# EAGLE board Stencil (EAGLE 9.6.2), part 1 of 2
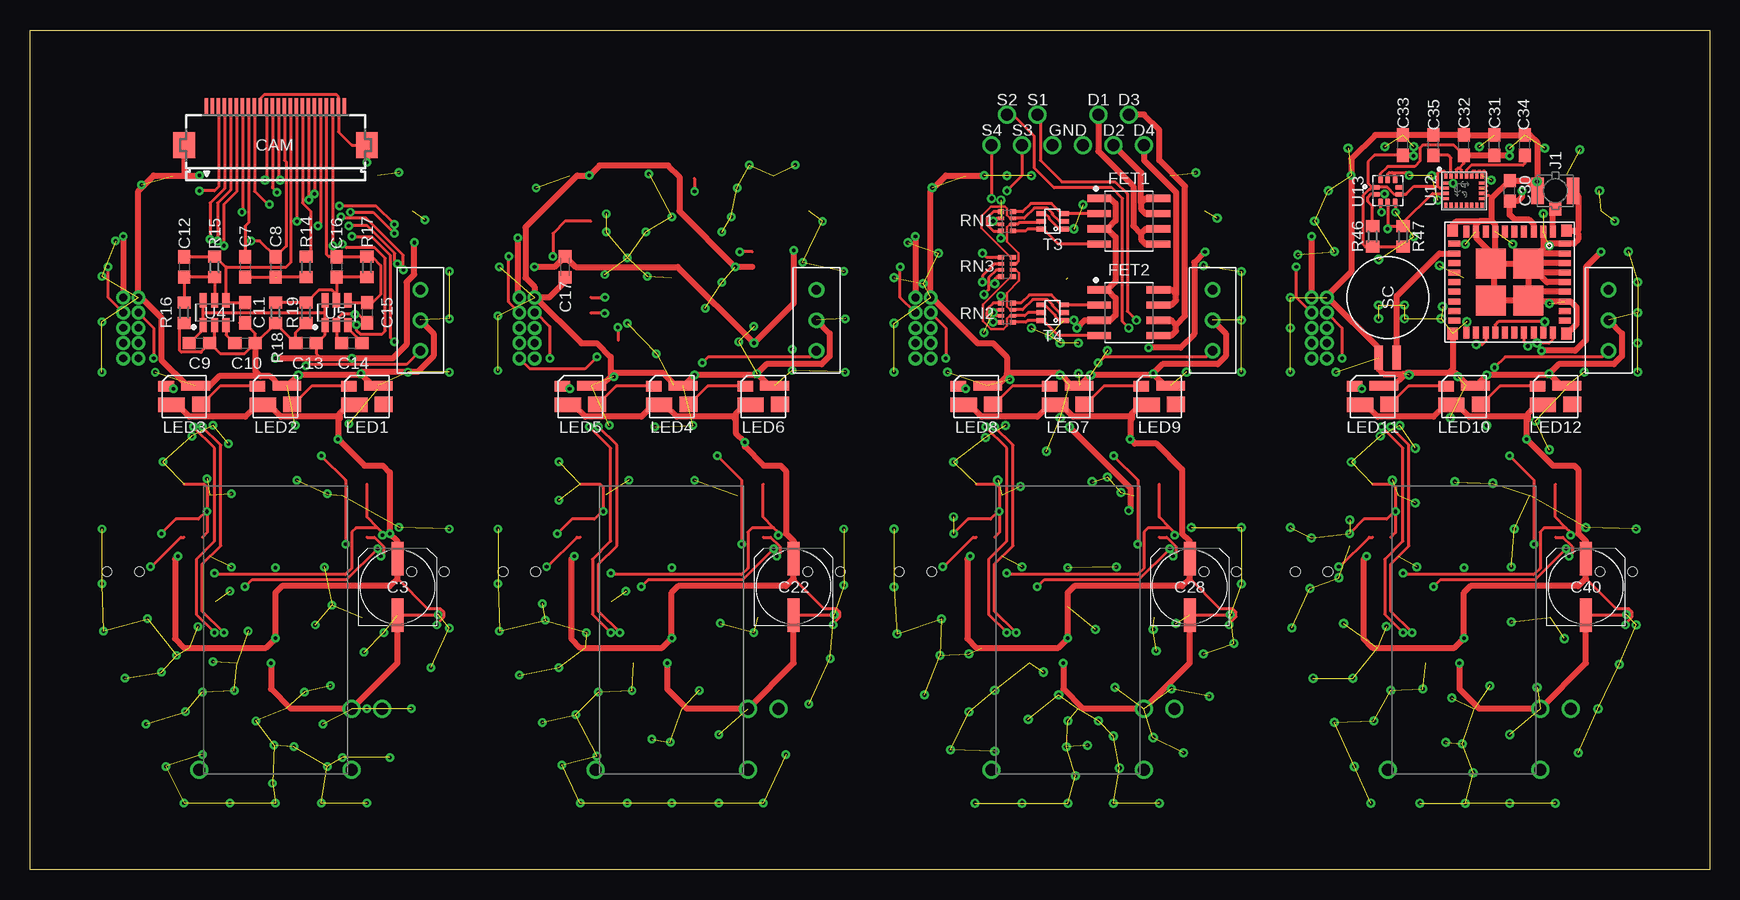
[diagram p0: board, top side]
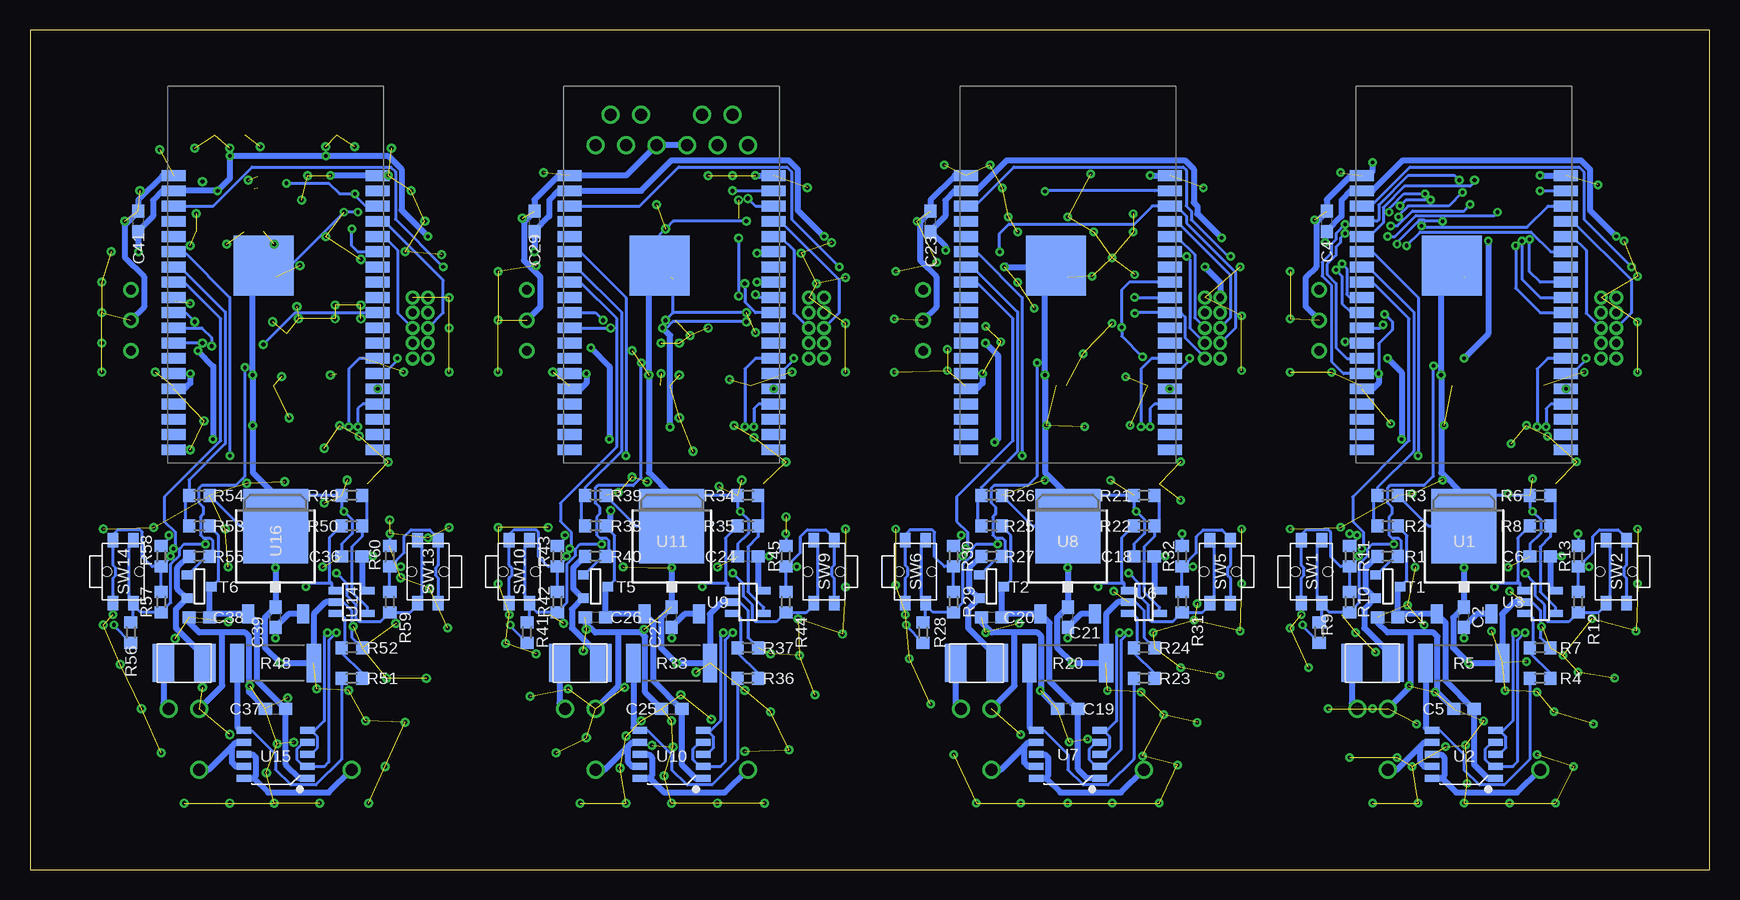
[diagram p1: board, bottom side, seen from below]

Size 140 x 70 mm. Coordinates in mm from the lower left corner, seen from the top.
Outline: 0,70 140,70 140,0 0,0 0,70
Copper layers (1*16): Top 0.035mm / dielectric 1.5mm / Bottom 0.035mm
Design rules "default": minimum track width 6mil, minimum drill 0.35mm, track to track 6mil, track to pad 6mil, pad to pad 6mil, via to via 6mil, smd to smd 6mil, copper to edge 40mil, drill to drill 6mil, minimum pad ring 10mil, minimum via ring 8mil, stop-mask expansion 4mil, vias tented up to drill 0mil, thermal gap 10mil

## Footprints (pad centres in the part's own frame; a part is rotated, then mirrored left to right if it is on the bottom)
C0603 = smd 1.1 x 1: 1 -0.85,0; 2 0.85,0
UD-6,3X7,7_NICHICON = smd 2.8 x 1: + 2.35,0; - -2.35,0
C0603K = smd 1.05 x 1.08: 1 -0.875,0; 2 0.875,0
FH12-24S-0.5SH = smd 0.3 x 1.3: 1 -5.75,3.25; 2 -5.25,3.25; 3 -4.75,3.25; 4 -4.25,3.25; 5 -3.75,3.25; 6 -3.25,3.25; 7 -2.75,3.25; 8 -2.25,3.25; 9 -1.75,3.25; 10 -1.25,3.25; 11 -0.75,3.25; 12 -0.25,3.25; 13 0.25,3.25; 14 0.75,3.25; 15 1.25,3.25; 16 1.75,3.25; 17 2.25,3.25; 18 2.75,3.25; 19 3.25,3.25; 20 3.75,3.25; 21 4.25,3.25; 22 4.75,3.25; 23 5.25,3.25; 24 5.75,3.25 | smd 1.8 x 2.2: PAD1 -7.62,0; PAD2 7.62,0
ESP32-WROVER-E = smd 2 x 0.9: 3V3 -8.5,10.16; EN -8.5,8.89; GND1 -8.5,11.43; GND2 -8.5,-6.35; GND3 8.5,11.43; IO0 8.5,-5.08; IO2 8.5,-6.35; IO4 8.5,-3.81; IO5 8.5,0; IO12 -8.5,-5.08; IO13 -8.5,-7.62; IO14 -8.5,-3.81; IO15 8.5,-7.62; IO16 8.5,-2.54; IO17 8.5,-1.27; IO18 8.5,1.27; IO19 8.5,2.54; IO21 8.5,5.08; IO22 8.5,8.89; IO23 8.5,10.16; IO25 -8.5,0; IO26 -8.5,-1.27; IO27 -8.5,-2.54; IO32 -8.5,2.54; IO33 -8.5,1.27; IO34 -8.5,5.08; IO35 -8.5,3.81; NC 8.5,3.81; NC0 -8.5,-8.89; NC1 -8.5,-10.16; NC2 -8.5,-11.43; NC3 8.5,-11.43; NC4 8.5,-10.16; NC5 8.5,-8.89; RXD0 8.5,6.35; SENSOR_VN -8.5,6.35; SENSOR_VP -8.5,7.62; TXD0 8.5,7.62 | smd 5 x 5: P_GND -1,3.93
SOIC127P600X175-8N = smd 1.968 x 0.602: 1 -2.473,1.905; 2 -2.473,0.635; 3 -2.473,-0.635; 4 -2.473,-1.905; 5 2.473,-1.905; 6 2.473,-0.635; 7 2.473,0.635; 8 2.473,1.905
SMD1812P = smd 1.78 x 3.15: 1 -1.725,0; 2 1.725,0
U.FL_SMT = smd 1.05 x 2.2: GND1 -1.475,0; GND2 1.475,0 | smd 1 x 1.05: SIG 0,-1.525
SK68XXMINI = smd 1.3 x 0.9: P1 1.5,-0.85 | smd 2.2 x 1.2: P2 1.05,0.7 | smd 1.5 x 1.3: P3 -1.4,0.65 | smd 2.4 x 0.8: P4 -0.95,-0.9
R0603 = smd 1 x 1.1: 1 -0.85,0; 2 0.85,0
R6332W = smd 1.2 x 3.2: 1 -3.196,0; 2 3.196,0
4X0402ARV341 = smd 0.4 x 0.5: 1 -0.8,-0.5; 4 0.8,-0.5; 5 0.8,0.5; 8 -0.8,0.5 | smd 0.3 x 0.5: 2 -0.25,-0.5; 3 0.25,-0.5; 6 0.25,0.5; 7 -0.25,0.5
DC,DCK = smd 0.7 x 2: + 0.75,-5; - -0.75,-5
THAU13-AB-R = smd 1.2 x 0.9: 1 -2.625,0.85; 2 2.625,0.85; 3 -2.625,-0.85; 4 2.625,-0.85 | hole 0.8: 0,1.35; 0,-1.35
SOT-23 = smd 0.787 x 0.889: 1 0.025,-1.016; 2 -0.94,1.016; 3 0.991,1.016
SOT-363 = smd 0.4 x 0.8: 1 -0.65,-0.95; 2 0,-0.95; 3 0.65,-0.95; 4 0.65,0.95; 5 0,0.95; 6 -0.65,0.95
TO252 = smd 1 x 1.6: 1 -2.28,-4.8; 3 2.28,-4.8 | smd 5.4 x 6.2: 2 0,2.5
SOIC10-1.0-5X4MM = smd 0.6 x 1.2: 1 -2,-2.65; 2 -1,-2.65; 3 0,-2.65; 4 1,-2.65; 5 2,-2.65; 6 2,2.65; 7 1,2.65; 8 0,2.65; 9 -1,2.65; 10 -2,2.65
SOT23-5 = smd 0.6 x 1.2: 1 -0.95,-1.306; 2 0,-1.306; 3 0.95,-1.306; 4 0.95,1.306; 5 -0.95,1.306
SOT95P240X110-6N = smd 1.18 x 0.609: 1 -1.024,0.95; 2 -1.024,0; 3 -1.024,-0.95; 4 1.024,-0.95; 5 1.024,0; 6 1.024,0.95
LGA24-8X4 = smd 0.27 x 0.45: 1 -1.505,1.225; 6 -1.505,-1.225; 7 -1.075,-1.225; 8 -0.645,-1.225; 9 -0.215,-1.225; 10 0.215,-1.225; 11 0.645,-1.225; 12 1.075,-1.225; 13 1.505,-1.225; 18 1.505,1.225; 19 1.075,1.225; 20 0.645,1.225; 21 0.215,1.225; 22 -0.215,1.225; 23 -0.645,1.225; 24 -1.075,1.225 | smd 0.45 x 0.27: 2 -1.475,0.645; 3 -1.475,0.215; 4 -1.475,-0.215; 5 -1.475,-0.645; 14 1.475,-0.645; 15 1.475,-0.215; 16 1.475,0.215; 17 1.475,0.645
PQFN60P250X250X80-10N = smd 0.59 x 0.4: 1 -0.92,0.3; 2 -0.92,-0.3; 6 0.92,-0.3; 7 0.92,0.3 | smd 0.4 x 0.59: 3 -0.6,-0.92; 4 0,-0.92; 5 0.6,-0.92; 8 0.6,0.92; 9 0,0.92; 10 -0.6,0.92
SS12D01GX = drill 0.8: 1 -2.54,0; 2 0,0; 3 2.54,0
P2_5_1.27 = drill 0.65 pad 1.016: P1 0,2.54; P2 1.27,2.54; P3 0,1.27; P4 1.27,1.27; P5 0,0; P6 1.27,0; P7 0,-1.27; P8 1.27,-1.27; P9 0,-2.54; P10 1.27,-2.54
GYSFFMANC = smd 1 x 0.9: 1 -4.3,4.75; 12 -4.3,-4.75; 22 4.3,-4.75; 33 4.3,4.75 | smd 1 x 0.5: 2 -4.2,3.6; 3 -4.2,2.8; 4 -4.2,2; 5 -4.2,1.2; 6 -4.2,0.4; 7 -4.2,-0.4; 8 -4.2,-1.2; 9 -4.2,-2; 10 -4.2,-2.8; 11 -4.2,-3.6; 23 4.2,-3.6; 24 4.2,-2.8; 25 4.2,-2; 26 4.2,-1.2; 27 4.2,-0.4; 28 4.2,0.4; 29 4.2,1.2; 30 4.2,2; 31 4.2,2.8; 32 4.2,3.6 | smd 0.5 x 1: 13 -3.2,-4.6; 14 -2.4,-4.6; 15 -1.6,-4.6; 16 -0.8,-4.6; 17 0,-4.6; 18 0.8,-4.6; 19 1.6,-4.6; 20 2.4,-4.6; 21 3.2,-4.6; 34 3.2,4.6; 35 2.4,4.6; 36 1.6,4.6; 37 0.8,4.6; 38 0,4.6; 39 -0.8,4.6; 40 -1.6,4.6; 41 -2.4,4.6; 42 -3.2,4.6 | smd 2.5 x 2.5: 43 -1.55,1.55; 44 -1.55,-1.55; 45 1.55,-1.55; 46 1.55,1.55

## Placement (x,y rotation side)
C1  0.33µF  [C0603]  26.82,21.03 180 bottom
C2  2.2µF  [C0603]  20.47,21.03 90 bottom
C3  220µF  [UD-6,3X7,7_NICHICON]  30.63,23.57 90 top
C4  0.1µF  [C0603]  31.9,54.05 90 bottom
C5  1µF  [C0603]  20.47,13.41 0 bottom
C6  0.1µF  [C0603]  14.12,26.11 180 bottom
C7  15pF  [C0603]  17.93,50.24 270 top
C8  0.1µF  [C0603]  20.47,50.24 270 top
C9  0.1µF  [C0603]  14.12,43.89 0 top
C10  0.01µF  [C0603]  17.93,43.89 0 top
C11  2.2µF  [C0603]  17.93,46.43 270 top
C12  100pF  [C0603]  12.85,50.24 270 top
C13  0.1µF  [C0603]  23.01,43.89 180 top
C14  0.01µF  [C0603]  26.82,43.89 180 top
C15  1.0µF  [C0603]  28.09,46.43 270 top
C16  100pF  [C0603]  25.55,50.24 270 top
C17  0.1µF  [C0603K]  44.6,50.24 270 top
C18  0.1µF  [C0603]  47.14,26.11 180 bottom
C19  1µF  [C0603]  53.49,13.41 0 bottom
C20  0.33µF  [C0603]  59.84,21.03 180 bottom
C21  2.2µF  [C0603]  53.49,21.03 90 bottom
C22  220µF  [UD-6,3X7,7_NICHICON]  63.65,23.57 90 top
C23  0.1µF  [C0603]  64.92,54.05 90 bottom
C24  0.1µF  [C0603]  80.16,26.11 180 bottom
C25  1µF  [C0603]  86.51,13.41 0 bottom
C26  0.33µF  [C0603]  92.86,21.03 180 bottom
C27  2.2µF  [C0603]  86.51,21.03 90 bottom
C28  220µF  [UD-6,3X7,7_NICHICON]  96.67,23.57 90 top
C29  0.1µF  [C0603]  97.94,54.05 90 bottom
C30  [C0603]  123.34,56.59 90 top
C31  10µF  [C0603]  122.07,60.4 90 top
C32  0.1µF  [C0603]  119.53,60.4 90 top
C33  0.1µF  [C0603]  114.45,60.4 90 top
C34  0.1µF  [C0603]  124.61,60.4 90 top
C35  0.01µF  [C0603]  116.99,60.4 90 top
C36  0.1µF  [C0603]  113.18,26.11 180 bottom
C37  1µF  [C0603]  119.53,13.41 0 bottom
C38  0.33µF  [C0603]  125.88,21.03 180 bottom
C39  2.2µF  [C0603]  119.53,21.03 90 bottom
C40  220µF  [UD-6,3X7,7_NICHICON]  129.69,23.57 90 top
C41  0.1µF  [C0603]  130.96,54.05 90 bottom
CAM  OV2640_FPC  [FH12-24S-0.5SH]  20.47,60.4 0 top
ESP32  ESP32-WROVER-E  [ESP32-WROVER-E]  20.47,46.43 0 bottom
FET1  FDS4935A  [SOIC127P600X175-8N]  91.59,54.05 0 top
FET2  FDS4935A  [SOIC127P600X175-8N]  91.59,46.43 0 top
HUSE1  SMD1812P125TS  [SMD1812P]  28.09,17.22 0 bottom
HUSE2  SMD1812P125TS  [SMD1812P]  61.11,17.22 0 bottom
HUSE3  SMD1812P125TS  [SMD1812P]  94.13,17.22 0 bottom
HUSE4  SMD1812P125TS  [SMD1812P]  127.15,17.22 0 bottom
J1  U.FL-R-SMT  [U.FL_SMT]  127.15,56.59 0 top
LED1  SK6812MINI  [SK68XXMINI]  28.09,39.45 180 top
LED2  SK6812MINI  [SK68XXMINI]  20.47,39.45 180 top
LED3  SK6812MINI  [SK68XXMINI]  12.85,39.45 180 top
LED4  SK6812MINI  [SK68XXMINI]  53.49,39.45 180 top
LED5  SK6812MINI  [SK68XXMINI]  45.87,39.45 180 top
LED6  SK6812MINI  [SK68XXMINI]  61.11,39.45 180 top
LED7  SK6812MINI  [SK68XXMINI]  86.51,39.45 180 top
LED8  SK6812MINI  [SK68XXMINI]  78.89,39.45 180 top
LED9  SK6812MINI  [SK68XXMINI]  94.13,39.45 180 top
LED10  SK6812MINI  [SK68XXMINI]  119.53,39.45 180 top
LED11  SK6812MINI  [SK68XXMINI]  111.91,39.45 180 top
LED12  SK6812MINI  [SK68XXMINI]  127.15,39.45 180 top
R1  100k  [R0603]  26.82,26.11 180 bottom
R2  200k  [R0603]  26.82,28.65 0 bottom
R3  100k  [R0603]  26.82,31.19 180 bottom
R4  1k  [R0603]  14.12,15.95 0 bottom
R5  20m  [R6332W]  20.47,17.22 180 bottom
R6  1k  [R0603]  14.12,31.19 0 bottom
R7  100k  [R0603]  14.12,18.49 0 bottom
R8  100k  [R0603]  14.12,28.65 180 bottom
R9  [R0603]  32.53,19.76 270 bottom
R10  [R0603]  29.99,22.3 270 bottom
R11  [R0603]  29.99,26.11 270 bottom
R12  [R0603]  10.95,22.3 270 bottom
R13  [R0603]  10.95,26.11 270 bottom
R14  1k  [R0603]  23.01,50.24 270 top
R15  10k  [R0603]  15.39,50.24 90 top
R16  100k  [R0603]  12.85,46.43 90 top
R17  10k  [R0603]  28.09,50.24 90 top
R18  47k  [R0603]  20.47,46.43 90 top
R19  10k  [R0603]  23.01,46.43 90 top
R20  20m  [R6332W]  53.49,17.22 180 bottom
R21  1k  [R0603]  47.14,31.19 0 bottom
R22  100k  [R0603]  47.14,28.65 180 bottom
R23  1k  [R0603]  47.14,15.95 0 bottom
R24  100k  [R0603]  47.14,18.49 0 bottom
R25  200k  [R0603]  59.84,28.65 0 bottom
R26  100k  [R0603]  59.84,31.19 180 bottom
R27  100k  [R0603]  59.84,26.11 180 bottom
R28  [R0603]  65.56,19.76 270 bottom
R29  [R0603]  63.02,22.3 270 bottom
R30  [R0603]  63.02,26.11 270 bottom
R31  [R0603]  43.97,22.3 270 bottom
R32  [R0603]  43.97,26.11 270 bottom
R33  20m  [R6332W]  86.51,17.22 180 bottom
R34  1k  [R0603]  80.16,31.19 0 bottom
R35  100k  [R0603]  80.16,28.65 180 bottom
R36  1k  [R0603]  80.16,15.95 0 bottom
R37  100k  [R0603]  80.16,18.49 0 bottom
R38  200k  [R0603]  92.86,28.65 0 bottom
R39  100k  [R0603]  92.86,31.19 180 bottom
R40  100k  [R0603]  92.86,26.11 180 bottom
R41  [R0603]  98.58,19.76 270 bottom
R42  [R0603]  96.03,22.3 270 bottom
R43  [R0603]  96.03,26.11 270 bottom
R44  [R0603]  76.98,22.3 270 bottom
R45  [R0603]  76.98,26.11 270 bottom
R46  10k  [R0603]  111.91,52.78 270 top
R47  10k  [R0603]  114.45,52.78 270 top
R48  20m  [R6332W]  119.53,17.22 180 bottom
R49  1k  [R0603]  113.18,31.19 0 bottom
R50  100k  [R0603]  113.18,28.65 180 bottom
R51  1k  [R0603]  113.18,15.95 0 bottom
R52  100k  [R0603]  113.18,18.49 0 bottom
R53  200k  [R0603]  125.88,28.65 0 bottom
R54  100k  [R0603]  125.88,31.19 180 bottom
R55  100k  [R0603]  125.88,26.11 180 bottom
R56  [R0603]  131.59,19.76 270 bottom
R57  [R0603]  129.06,22.3 270 bottom
R58  [R0603]  129.06,26.11 270 bottom
R59  [R0603]  110,22.3 270 bottom
R60  [R0603]  110,26.11 270 bottom
RN1  10k  [4X0402ARV341]  81.43,54.05 270 top
RN2  10k  [4X0402ARV341]  81.43,46.43 270 top
RN3  10k  [4X0402ARV341]  81.43,50.24 270 top
SC  DCK-3R3E  [DC,DCK]  113.18,47.7 0 top
SW1  THAU13-AB-R  [THAU13-AB-R]  33.17,24.84 270 bottom
SW2  THAU13-AB-R  [THAU13-AB-R]  7.77,24.84 90 bottom
SW5  THAU13-AB-R  [THAU13-AB-R]  40.79,24.84 90 bottom
SW6  THAU13-AB-R  [THAU13-AB-R]  66.19,24.84 270 bottom
SW9  THAU13-AB-R  [THAU13-AB-R]  73.81,24.84 90 bottom
SW10  THAU13-AB-R  [THAU13-AB-R]  99.21,24.84 270 bottom
SW13  THAU13-AB-R  [THAU13-AB-R]  106.83,24.84 90 bottom
SW14  THAU13-AB-R  [THAU13-AB-R]  132.23,24.84 270 bottom
T1  [SOT-23]  26.82,23.57 90 bottom
T2  [SOT-23]  59.84,23.57 90 bottom
T3  HN1C01FU  [SOT-363]  85.24,54.05 90 top
T4  HN1C01FU  [SOT-363]  85.24,46.43 90 top
T5  [SOT-23]  92.86,23.57 90 bottom
T6  [SOT-23]  125.88,23.57 90 bottom
U1  I-02247_NJM2845  [TO252]  20.47,26.11 0 bottom
U2  DRIVER-LV8548MC-AH(SOIC10)  [SOIC10-1.0-5X4MM]  20.47,9.6 90 bottom
U3  OPA340N  [SOT23-5]  14.12,22.3 270 bottom
U4  NJM11100  [SOT95P240X110-6N]  15.39,46.43 90 top
U5  NJM11100  [SOT95P240X110-6N]  25.55,46.43 90 top
U6  OPA340N  [SOT23-5]  47.14,22.3 270 bottom
U7  DRIVER-LV8548MC-AH(SOIC10)  [SOIC10-1.0-5X4MM]  53.49,9.6 90 bottom
U8  I-02247_NJM2845  [TO252]  53.49,26.11 0 bottom
U9  OPA340N  [SOT23-5]  80.16,22.3 270 bottom
U10  DRIVER-LV8548MC-AH(SOIC10)  [SOIC10-1.0-5X4MM]  86.51,9.6 90 bottom
U11  I-02247_NJM2845  [TO252]  86.51,26.11 0 bottom
U12  LSM9DS1  [LGA24-8X4]  119.53,56.59 0 top
U13  LPS25HB  [PQFN60P250X250X80-10N]  113.18,56.59 0 top
U14  OPA340N  [SOT23-5]  113.18,22.3 270 bottom
U15  DRIVER-LV8548MC-AH(SOIC10)  [SOIC10-1.0-5X4MM]  119.53,9.6 90 bottom
U16  I-02247_NJM2845  [TO252]  119.53,26.11 0 bottom
U$1  ESP32-WROVER-E  [ESP32-WROVER-E]  86.51,46.43 0 bottom
U$2  ESP32-WROVER-E  [ESP32-WROVER-E]  53.49,46.43 0 bottom
U$3  SS12D01GX  [SS12D01GX]  98.58,45.8 90 top
U$4  SS12D01GX  [SS12D01GX]  65.56,45.8 90 top
U$5  P2_5_1.27  [P2_5_1.27]  40.79,45.16 0 top
U$6  P2_5_1.27  [P2_5_1.27]  73.81,45.16 0 top
U$7  GYSFFMANC  [GYSFFMANC]  123.34,48.97 270 top
U$8  SS12D01GX  [SS12D01GX]  32.53,45.8 90 top
U$9  P2_5_1.27  [P2_5_1.27]  7.77,45.16 0 top
U$10  ESP32-WROVER-E  [ESP32-WROVER-E]  119.53,46.43 0 bottom
U$11  SS12D01GX  [SS12D01GX]  131.59,45.8 90 top
U$12  P2_5_1.27  [P2_5_1.27]  106.83,45.16 0 top

## Library data of the parts
C1-C8 C17-C41 = rcl; SPICEPREFIX: C
C9-C16 R15-R19 = resistor
CAM = camera
ESP32 U$1 U$2 U$10 = esp32
FET1 FET2 = mosfets
HUSE1-HUSE4 = ptc
J1 = connector; DIGIKEY: H122041-ND; MANUFACTURER: Hirose; MPN: U.FL-R-SMT-1(01)
LED1-LED12 = leds
R1-R14 R20-R60 = rcl; SPICEPREFIX: R
RN1-RN3 = resistor-dil; OC_FARNELL: unknown; OC_NEWARK: unknown
SC = capacitors
SW1 SW2 SW5 SW6 SW9 SW10 SW13 SW14 U$3 U$4 U$8 U$11 = switches
T1 T2 T5 T6 = zetex; OC_FARNELL: unknown; OC_NEWARK: unknown
T3 T4 = transistors
U1 U8 U11 U16 = akizuki
U2 U7 U10 U15 = DRIVER-LV8548MC-AH_SOIC10_; AVAILABILITY: Not in stock; DESCRIPTION: Half Bridge (4) Driver DC Motors, General Purpose, Stepper Motors DMOS 10-SOIC; MF: ON Semiconductor; MP: LV8548MC-AH; PACKAGE: SOIC NB-10 ON Semiconductor; PRICE: None
U3 U6 U9 U14 = burr-brown; MPN: OPA340NA/3KG4; OC_FARNELL: 1234805; OC_NEWARK: 13M5177
U4 U5 = regulators
U12 = LSM9DS1; PROD_ID: IC-12536
U13 = LPS25HB; AVAILABILITY: In Stock; DESCRIPTION: Pressure Sensor 3.77PSI ~ 18.27PSI (26kPa ~ 126kPa) Absolute - 24 b 10-VFLGA; MF: STMicroelectronics; MP: LPS25HB; PACKAGE: VFLGA-10 STMicroelectronics; PRICE: None; PURCHASE-URL: https://pricing.snapeda.com/search/part/LPS25HB/?ref=eda
U$5 U$6 U$9 U$12 = pins
U$7 = gps

## Nets
1: U$9.P7
1.3V: C11.1 C12.1 CAM.15 R15.2 U4.4
1PPS: U$7.29 U$10.IO26
2: U$9.P8
2.8V: C15.1 C16.1 CAM.21 R17.2 U5.4
3: U$9.P9
4: U$9.P10
5: U$6.P7
6: U$6.P8
7: U$6.P9
8: U$6.P10
9: U$12.P7
10: U$12.P8
11: U$12.P9
12: U$12.P10
ANT: J1.SIG U$7.2
BAT+: HUSE1.1
BAT+1: HUSE2.1
BAT+2: HUSE3.1
BAT+3: HUSE4.1
C1: RN3.1 U$1.IO21
C2: RN3.2 U$1.IO19
C3: RN3.3 U$1.IO18
C4: RN3.4 U$1.IO5
CAM_RESET: CAM.19 ESP32.IO14
D0: CAM.6 ESP32.IO5
D1: CAM.4 ESP32.IO19
D2: CAM.3 ESP32.IO23
D3: CAM.5 ESP32.IO18
D4: CAM.7 ESP32.IO27
D5: CAM.9 ESP32.IO33
D6: CAM.11 ESP32.SENSOR_VN
D7: CAM.13 ESP32.SENSOR_VP
D8: FET1.5 FET1.6
D9: FET1.7 FET1.8
D10: FET2.5 FET2.6
D11: FET2.7 FET2.8
GND: C1.2 C2.2 C3.- C4.2 C5.1 C6.2 C7.2 C8.2 C9.2 C10.2 C11.2 C13.2 C14.2 C15.2 CAM.10 CAM.23 CAM.PAD1 CAM.PAD2 ESP32.GND1 ESP32.GND2 ESP32.GND3 ESP32.P_GND LED1.P4 LED2.P4 LED3.P4 R3.1 R5.1 R6.1 R7.2 R13.1 R14.2 R16.1 R18.1 R19.1 U1.2 U3.2 U4.2 U5.2 U$8.2 U$9.P2
GND1: C17.2 C18.2 C19.1 C20.2 C21.2 C22.- C23.2 LED4.P4 LED5.P4 LED6.P4 R20.1 R21.1 R24.2 R26.1 R32.1 U6.2 U8.2 U$2.GND1 U$2.GND2 U$2.GND3 U$2.P_GND U$4.2 U$5.P2
GND2: C24.2 C25.1 C26.2 C27.2 C28.- C29.2 LED7.P4 LED8.P4 LED9.P4 R33.1 R34.1 R37.2 R39.1 R45.1 RN1.2 RN1.3 RN2.2 RN2.3 T3.1 T3.4 T4.1 T4.4 U9.2 U11.2 U$1.GND1 U$1.GND2 U$1.GND3 U$1.P_GND U$3.2 U$6.P2
GND3: C30.2 C31.2 C32.2 C33.2 C34.2 C35.2 C36.2 C37.1 C38.2 C39.2 C40.- C41.2 J1.GND1 J1.GND2 LED10.P4 LED11.P4 LED12.P4 R48.1 R49.1 R52.2 R54.1 R60.1 SC.- U12.14 U12.15 U12.16 U12.17 U12.18 U12.19 U12.20 U13.3 U13.5 U13.8 U13.9 U14.2 U16.2 U$7.1 U$7.3 U$7.8 U$7.10 U$7.12 U$7.22 U$7.33 U$7.36 U$7.37 U$7.38 U$7.39 U$7.40 U$7.41 U$7.42 U$7.43 U$7.44 U$7.45 U$7.46 U$10.GND1 U$10.GND2 U$10.GND3 U$10.P_GND U$11.2 U$12.P2
GPS_!RESET!: U$7.32 U$10.IO27
GPS_RTX: U$7.26 U$10.IO25
GPS_TRX: U$7.25 U$10.IO5
HSYNC: CAM.16 ESP32.IO26
I2C_SCL: CAM.20 ESP32.IO22
I2C_SCL1: R46.1 U12.2 U13.2 U$10.IO22
I2C_SDA: CAM.22 ESP32.IO21
I2C_SDA1: R47.1 U12.4 U13.4 U$10.IO21
LED: ESP32.IO2 LED3.P1
LED1: LED5.P1 U$2.IO2
LED2: LED8.P1 U$1.IO2
LED3: LED11.P1 U$10.IO2
M1: U2.8 U2.10
M2: U2.7 U2.9
M3: U7.8 U7.10
M4: U7.7 U7.9
M5: U10.8 U10.10
M6: U10.7 U10.9
M7: U15.8 U15.10
M8: U15.7 U15.9
MC1: ESP32.IO15 U2.2 U2.4
MC2: ESP32.IO4 U2.3 U2.5
MC3: U7.2 U7.4 U$2.IO15
MC4: U7.3 U7.5 U$2.IO4
MC5: U10.2 U10.4 U$1.IO15
MC6: U10.3 U10.5 U$1.IO4
MC7: U15.2 U15.4 U$10.IO15
MC8: U15.3 U15.5 U$10.IO4
MGND: R4.1 R5.2 U2.6
MGND1: R20.2 R23.1 U7.6
MGND2: R33.2 R36.1 U10.6
MGND3: R48.2 R51.1 U15.6
MSENSE: ESP32.IO32 R8.2 U3.1
MSENSE1: R22.2 U6.1 U$2.IO32
MSENSE2: R35.2 U9.1 U$1.IO32
MSENSE3: R50.2 U14.1 U$10.IO32
N$1: C10.1 U4.3
N$2: C12.2 R15.1 R16.2 U4.5
N$3: C14.1 U5.3
N$4: C16.2 R17.1 R18.2 R19.2 U5.5
N$5: LED4.P1 LED5.P3
N$6: LED4.P3 LED6.P1
N$7: CAM.17 R14.1
N$8: R30.1 R31.2 SW5.1 SW5.2
N$9: HUSE2.2 R27.2 T2.2
N$10: ESP32.IO13
N$11: R21.2 R22.1 U6.4
N$12: R23.2 R24.1 U6.3
N$13: R27.1 T2.3 U$4.1
N$14: HUSE1.2 R1.2 T1.2
N$15: R6.2 R8.1 U3.4
N$16: R4.2 R7.1 U3.3
N$17: R1.1 T1.3 U$8.1
N$18: LED2.P1 LED3.P3
N$19: LED1.P1 LED2.P3
N$20: R11.1 R12.2 SW2.1 SW2.2
N$21: R10.1 R11.2 SW1.3 SW1.4
N$22: R12.1 R13.2 SW2.3 SW2.4
N$23: R29.1 R30.2 SW6.3 SW6.4
N$24: R31.1 R32.2 SW5.3 SW5.4
N$25: FET1.4 RN1.5 T3.6
N$26: FET1.2 RN1.8 T3.3
N$27: RN1.7 RN3.8 T3.2
N$28: RN1.6 RN3.7 T3.5
N$29: RN2.7 RN3.6 T4.2
N$30: FET2.4 RN2.5 T4.6
N$31: FET2.2 RN2.8 T4.3
N$32: RN2.6 RN3.5 T4.5
N$33: HUSE3.2 R40.2 T5.2
N$34: R34.2 R35.1 U9.4
N$35: R36.2 R37.1 U9.3
N$36: R40.1 T5.3 U$3.1
N$37: LED7.P1 LED8.P3
N$38: LED7.P3 LED9.P1
N$39: R43.1 R44.2 SW9.1 SW9.2
N$40: R42.1 R43.2 SW10.3 SW10.4
N$41: R44.1 R45.2 SW9.3 SW9.4
N$42: SC.+ U$7.14
N$43: C35.1 U12.24
N$44: C34.1 U12.21
N$45: HUSE4.2 R55.2 T6.2
N$46: R49.2 R50.1 U14.4
N$47: R51.2 R52.1 U14.3
N$48: R55.1 T6.3 U$11.1
N$49: LED10.P1 LED11.P3
N$50: LED10.P3 LED12.P1
N$51: R58.1 R59.2 SW13.1 SW13.2
N$52: R57.1 R58.2 SW14.3 SW14.4
N$53: R59.1 R60.2 SW13.3 SW13.4
PCLK: C7.1 CAM.8
PRG: ESP32.IO0 U$9.P4
PRG1: U$2.IO0 U$5.P4
PRG2: U$1.IO0 U$6.P4
PRG3: U$10.IO0 U$12.P4
RESET: ESP32.EN U$9.P3
RESET1: U$2.EN U$5.P3
RESET2: U$1.EN U$6.P3
RESET3: U$10.EN U$12.P3
RX: ESP32.RXD0 U$9.P6
RX1: U$2.RXD0 U$5.P6
RX2: U$1.RXD0 U$6.P6
RX3: U$10.RXD0 U$12.P6
S1: U$1.IO25
S2: U$1.IO26
S3: U$1.IO23
S4: U$1.IO22
SW: ESP32.IO34 R9.1 R10.2 SW1.1 SW1.2
SW1: R28.1 R29.2 SW6.1 SW6.2 U$2.IO34
SW2: R41.1 R42.2 SW10.1 SW10.2 U$1.IO34
SW3: R56.1 R57.2 SW14.1 SW14.2 U$10.IO34
TWE_!PGM!: U$5.P8
TWE_!RESET!: U$2.IO22 U$5.P7
TWE_!RTS!: U$2.IO18
TWE_RTX: U$2.IO5 U$5.P10
TWE_SLEEP: U$2.IO23
TWE_TRX: U$2.IO19 U$5.P9
TX: ESP32.TXD0 U$9.P5
TX1: U$2.TXD0 U$5.P5
TX2: U$1.TXD0 U$6.P5
TX3: U$10.TXD0 U$12.P5
VCC: C1.1 C5.2 R2.2 T1.1 U1.1 U2.1
VCC1: C19.2 C20.1 R25.2 T2.1 U7.1 U8.1
VCC2: C25.2 C26.1 FET1.1 FET1.3 FET2.1 FET2.3 R38.2 RN1.1 RN1.4 RN2.1 RN2.4 T5.1 U10.1 U11.1
VCC3: C37.2 C38.1 R53.2 T6.1 U15.1 U16.1
VDD: C2.1 C3.+ C4.1 C6.1 C8.1 C9.1 C13.1 CAM.14 ESP32.3V3 LED1.P2 LED2.P2 LED3.P2 R9.2 U1.3 U3.5 U4.1 U4.6 U5.1 U5.6 U$9.P1
VDD1: C17.1 C18.1 C21.1 C22.+ C23.1 LED4.P2 LED5.P2 LED6.P2 R28.2 U6.5 U8.3 U$2.3V3 U$5.P1
VDD2: C24.1 C27.1 C28.+ C29.1 LED7.P2 LED8.P2 LED9.P2 R41.2 U9.5 U11.3 U$1.3V3 U$6.P1
VDD2.8_OUT: U$7.7
VDD3: C30.1 C31.1 C32.1 C33.1 C36.1 C39.1 C40.+ C41.1 LED10.P2 LED11.P2 LED12.P2 R46.2 R47.2 R56.2 U12.1 U12.3 U12.22 U12.23 U13.1 U13.6 U13.10 U14.5 U16.3 U$7.4 U$10.3V3 U$12.P1
VSENSE: ESP32.IO35 R2.1 R3.2
VSENSE1: R25.1 R26.2 U$2.IO35
VSENSE2: R38.1 R39.2 U$1.IO35
VSENSE3: R53.1 R54.2 U$10.IO35
VSYNC: CAM.18 ESP32.IO12
XCLK: CAM.12 ESP32.IO25